# Altium PCB board.PcbDoc
Units mm, origin at the board's own origin, x right, y up, seen from the top; angles counter-clockwise.
Board outline 13.5 x 6.5 mm, 2 copper layers (Top Layer, Bottom Layer), stack 0.97 mm thick; 11 components, 7 nets, 26 pads, 4 vias.
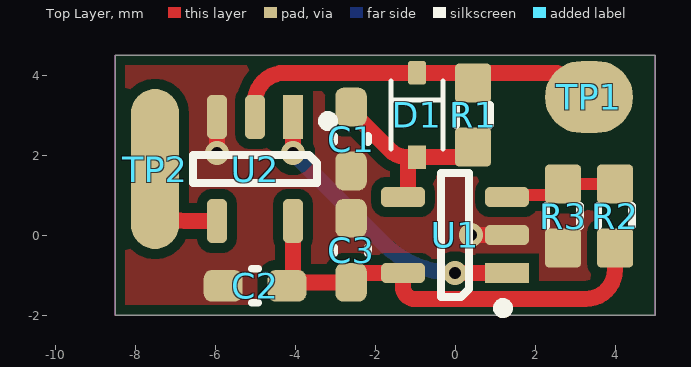
[diagram p0: Top Layer view]
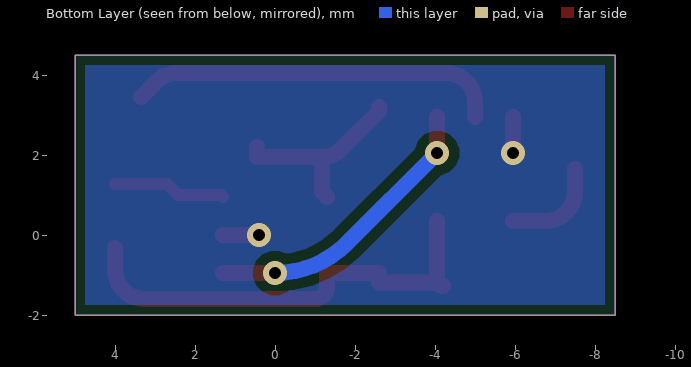
[diagram p1: Bottom Layer view, seen from below]
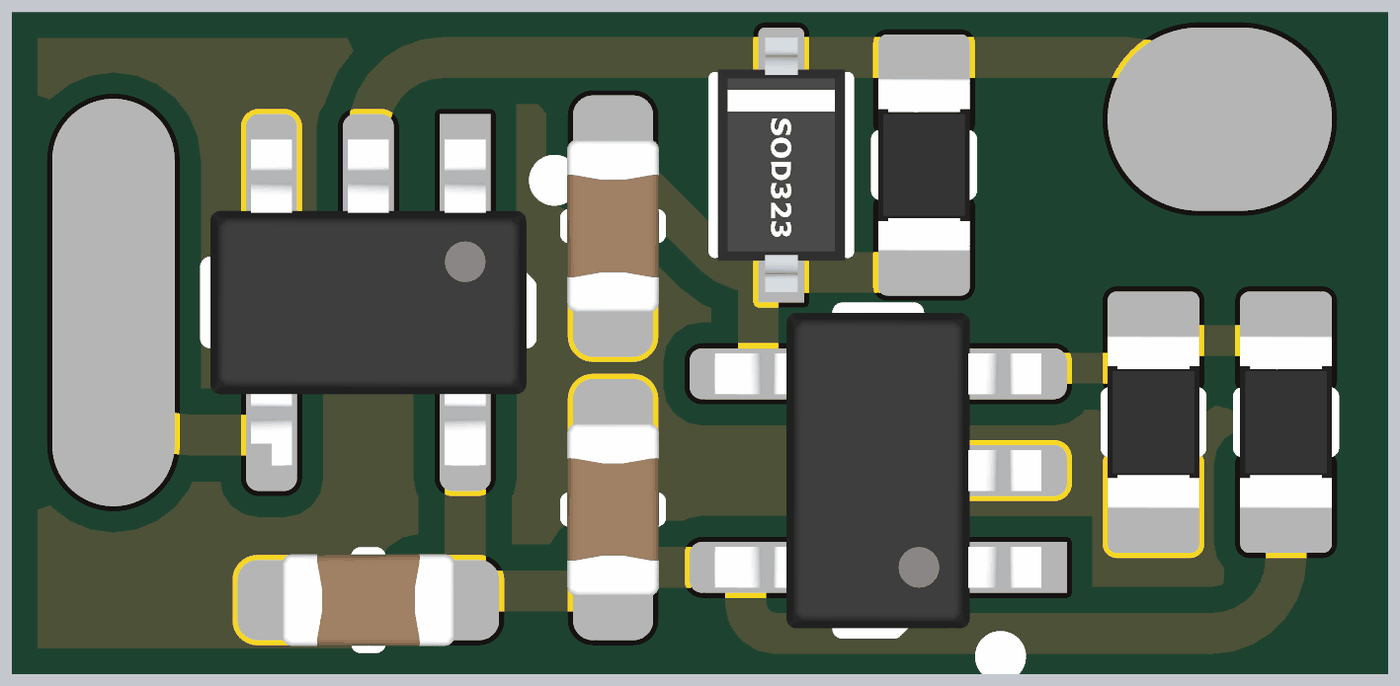
[diagram p2: 3D render of the assembled board from above, using the file's embedded part models]

## Layer stack, top to bottom
Top Solder: solder mask 0.0127, Solder Resist, Dk 3.8
Top Layer: signal copper 0.035
Dielectric: core 0.9, FR-4, Dk 4.5
Bottom Layer: signal copper 0.035
Bottom Solder: solder mask 0.0127, Solder Resist, Dk 3.8

## Board outline
-8.5,-2 5,-2 5,4.5 -8.5,4.5

## Design rules (kind name [scope] priority, off if disabled: settings)
AcuteAngle [All] p1: minimum=6.00000000000000E+0001 checktracksonly=FALSE
Clearance Clearance_1 [All] p1: gap=0.25 ignorepadtopadclearanceinfootprint=FALSE except(0.13: Arc-Arc Arc-Track Arc-SMDPad Arc-Via Track-Track Track-SMDPad Track-Via SMDPad-SMDPad SMDPad-Via THPad-Via Via-Via; 0.15: Arc-THPad Arc-Text Arc-Hole Track-THPad Track-Text Track-Hole SMDPad-THPad SMDPad-Text SMDPad-Hole THPad-THPad THPad-Text THPad-Hole Via-Text Via-Hole Fill-Text Fill-Hole Poly-Text Poly-Hole Region-Text Region-Hole Text-Text Text-Hole)
ComponentClearance ComponentClearance_1 [HasFootprint('CONN_DG308-2.54-2P') vs HasFootprint('CONN_DG308-2.54-2P')] p1: gap=-1 collisioncheckmode=3 verticalgap=2540 showdistances=FALSE
ComponentClearance [All] p2: gap=0.3 collisioncheckmode=3 verticalgap=0.254 showdistances=FALSE
HoleSize [All] p1: absolutevalues=TRUE maxlimit=6 minlimit=0.2 maxpercent=80.000 minpercent=20.000
HoleToHoleClearance HoleToHoleClearance_1 [IsVia vs IsThruPin] p1: gap=0.7 allowstackedmicrovias=TRUE
HoleToHoleClearance [All] p2: gap=0.5 allowstackedmicrovias=TRUE
MinimumSolderMaskSliver [All] p1 off: minsoldermaskwidth=0.254
PlaneClearance [All] p1: clearance=0.45
PlaneConnect [All] p1: planeconnectstyle=Direct reliefexpansion=0.3 reliefentries=4 reliefconductorwidth=0.381 reliefairgap=0.178
PolygonConnect [All] p1: connectstyle=Direct reliefconductorwidth=0.381 reliefentries=4 polygonreliefangle="90 Angle" airgapwidth=0.356
RoutingVias [All] p1: holewidth=0.3 width=0.6 viastyle="Through Hole" minholewidth=0.2 minwidth=0.45 maxholewidth=0.9 maxwidth=1.27
SilkToSilkClearance [All] p1 off: silktosilkclearance=0.254
SilkToSolderMaskClearance [IsPad] p1 off: minsilkscreentomaskgap=0.254 clearancetoexposedcopper=TRUE
SolderMaskExpansion [All] p1: expansion=0.102 istentingtop=FALSE
UnRoutedNet [All] p1: checkbadconnections=TRUE
Width [All] p1: maxlimit=3.81 minlimit=0.14 preferedwidth=0.254
21 further rules are at their usual default settings.

## Components (designator, comment, footprint, x,y, rotation, side; value= is the part's Value field where it differs from the comment)
C1 "10nF" C0603 -2.6,2.4 r90 top
C2 "100nF" C0603 -5,-1.271 r0 top
C3 "100nF" C0603 -2.6,-0.382 r270 top
D1 "1N4148WS" SOD-323 -0.95,3 r270 top
R1 "120k" R0603 0.45,3 r90 top
R2 "10k" R0603 4,0.475 r270 top
R3 "10k" R0603 2.7,0.475 r90 top
TP1 "" TP2030_SMD#1 3.35,3.45 r270 top
TP2 "" TP2030_SMD#2 -7.5,1.8 r180 top
U1 "TS3021ILT" SOT-23-5 0,0 r0 top
U2 "MC74HC1G08" SOT-23-5 -5,1.65 r90 top

## Footprints (in the part's own frame and the unit in brackets; to place one, negate y for a bottom-side part, rotate by r counter-clockwise, add the part's x,y. Pads: shape width x height; smd on the part's side, far side on the other; paste and mask are expansions set on the pad)
C0603 [mil] "Chip Capacitor"
  rrect50% 38x31 smd mask+1.97: 1(-31.5,0) 2(31.5,0)
  silkscreen extent -3,-17 3,17, body extent -33,-18 33,18, height 35
R0603 [mil] "Chip Resistor; Body 1.6 x 0.8 mm (LxW typ)"
  rrect20% 38x35.43 smd mask+1.97: 1(-31.5,0) 2(31.5,0)
  silkscreen extent -10,-17 10,17, body extent -33,-18 33,18, height 22
SOD-323 [mm]
  rect 0.59x0.45 smd mask+0.05: 1(1.055,0)
  rrect30% 0.59x0.45 smd mask+0.05: 2(-1.055,0)
  silkscreen extent -0.85,-0.65 0.85,0.65, body extent -1.25,-0.63 1.25,0.62, height 0.99
SOT-23-5 [mm]
  rect 1.1x0.5 smd mask+0.05: 1(1.3,-0.95)
  rrect50% 1.1x0.5 smd mask+0.05: 2(1.3,0) 3(1.3,0.95) 4(-1.3,0.95) 5(-1.3,-0.95)
  silkscreen extent -0.35,-1.95 1.33,1.55, body extent -1.6,-1.55 1.6,1.55, height 1.45
TP2030_SMD#1 [mm] "TP30_SMD"
  oval 1.8x2.2 smd mask+0.05: 1(0,0)
TP2030_SMD#2 [mm] "TP30_SMD"
  oval 1.2x4 smd mask+0.05: 1(0,0.15)

## Part data
C1: library part CAP, "10nF 50V 0603"
C2 C3: library part CAP, "100nF 50V 0603"
D1: library part US1M-13-F
R1: library part RES_0402_1K5-1%, "120k 5% 0603"
R2 R3: library part RES_0402_1K5-1%, "10k 5% 0603"
TP1 TP2: library part TP_Dup1
U2: library part MC74HC1G08DTT1G

## Via types
v1: diameter 0.6, hole 0.3, Top Layer to Bottom Layer, tented both sides, 4 vias

## Nets (pads, with @x,y where several pads share a name; then routed paths per layer and width w, separated by ;. In a path a pad name is that pad's centre, name@x,y a point inside that pad or via, vN(x,y) a via of type N, cw(c..) or ccw(c..) an arc to the next point about the centre after c; other vN are vias at no path point)
5V: C2.2 C3.2 R2.2 U1.5 U2.5 | length 11.3
  Top Layer w0.4: C2.2 ccw(c-4.2,-1.122) C2.2@-4.063,-1.183 ; U2.5 -4.05,-1.122 cw(c-4.2,-1.122) C2.2@-4.063,-1.183 ; C3.2 C2.2@-4.063,-1.183 ; C3.2@-2.6,-0.95 U1.5 -1.3,-1.3 ccw(c-1,-1.3) -1,-1.6 3.263,-1.6 ccw(c3.263,-0.863) 4,-0.863 R2.2
GND: C1.1 C2.1 C3.1 R3.1 U1.2 U2.3 | length 1.8
  Top Layer w0.4: v1(-5.95,2.05) U2.3 ; v1(0.4,0) U1.2
NetC1_2: C1.2 D1.1 R1.1 U1.4 | length 4.9
  Top Layer w0.4: C1.2 -2.6,3.1 -1.635,2.135 ; -1.635,2.135 ccw(c-1.176,2.594) -1.176,1.945 ; U1.4 -1.176,1.074 -1.176,1.945 ; R1.1 0.45,1.945 D1.1 -1.176,1.945
NetD1_2: D1.2 R1.2 TP1.1 U2.2 | length 9.4
  Top Layer w0.4: U2.2 -5,3.318 cw(c-4.263,3.318) -4.263,4.055 D1.2 2.44,4.055 cw(c2.44,3.318) 2.961,3.839 TP1.1
NetR2_1: R2.1 R3.2 U1.3 | length 2.8
  Top Layer w0.3: U1.3 1.355,1.005 2.43,1.005 R3.2 R2.1
NetTP2_1: TP2.1 U2.4 | length 2.5
  Top Layer w0.4: TP2.1 -7.5,1.087 ccw(c-6.763,1.087) -6.763,0.35 U2.4
NetU1_1: U1.1 U2.1 | length 7.4
  Top Layer w0.4: v1(-4.05,2.05) U2.1 ; v1(0,-0.95) U1.1
  Bottom Layer w0.4: v1(-4.05,2.05) -1.792,-0.207 ccw(c0,1.585) v1(0,-0.95)

## Polygon pours and split planes (outlines as drawn)
GND on Top Layer "NONET_L02_P-001" (solid, remove dead copper, pour order 1): 5,4.5 5,-2 -8.5,-2 -8.5,4.5
GND on Bottom Layer "NONET_L02_P-001" (solid, remove dead copper, pour order 0): -8.5,4.5 -8.5,-2 5,-2 5,4.5

## Keep-outs
Keep-Out Layer:
  the board outline again, w0